# Altium PCB Isolated DCDC converter.PcbDoc
Units mm, origin at the board's own origin, x right, y up, seen from the top; angles counter-clockwise.
Board outline 55.88 x 25.4 mm, 2 copper layers (Top Layer, Bottom Layer), stack 1.575 mm thick; 26 components, 20 nets, 84 pads, 6 vias.
Unrouted connection lines stored in the file: 1.
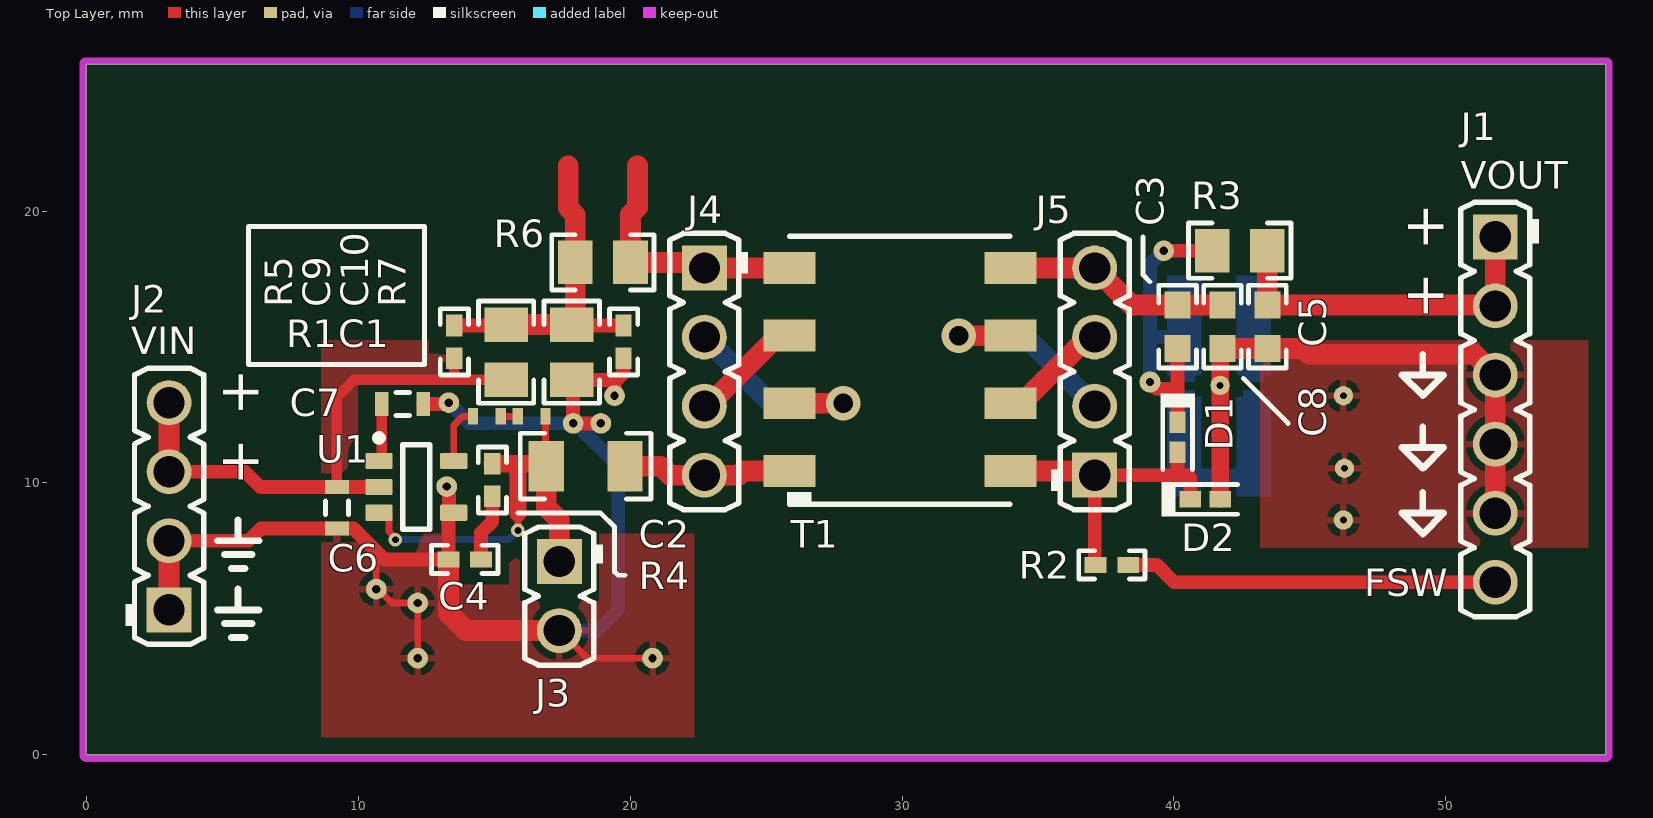
[diagram p0: Top Layer view]
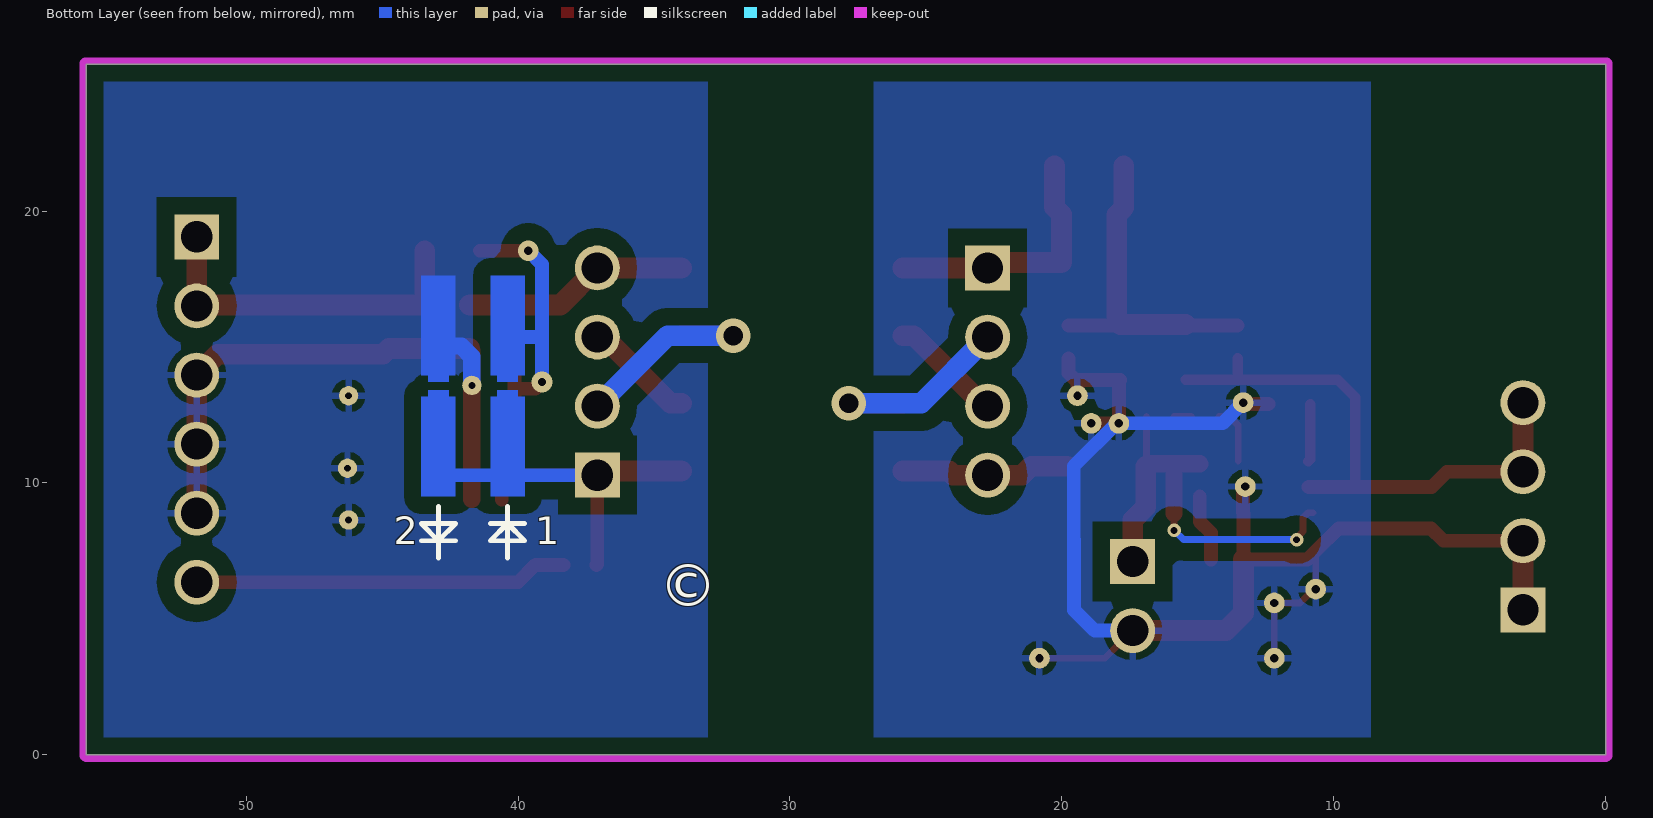
[diagram p1: Bottom Layer view, seen from below]

## Layer stack, top to bottom
Top Solder: solder mask 0.0102, Solder Resist, Dk 3.5
Top Layer: signal copper 0.0356
Dielectric1: core 1.5037, FR-4, Dk 4.8
Bottom Layer: signal copper 0.0356
Bottom Solder: solder mask 0.0102, Solder Resist, Dk 3.5

## Board outline
0,0 55.88,0 55.88,25.4 0,25.4

## Design rules (kind name [scope] priority, off if disabled: settings)
AcuteAngle [All] p1: minimum=4.50000000000000E+0001 checktracksonly=FALSE
AssemblyTestPointUsage [All] p1: valid=2
Clearance Clearance_Keepouts [((IsTrack Or IsArc) And Not InPoly) And IsFree and IsKeepOut vs ((IsTrack Or IsArc) And Not InPoly) And IsFree and IsKeepOut] p1: gap=0 ignorepadtopadclearanceinfootprint=FALSE
Clearance Clearance_BoardEdge_MountingHoles [OnCopper and InComponentClass('Mounting Holes') vs IsKeepOut] p2: gap=1.016 ignorepadtopadclearanceinfootprint=FALSE
Clearance Clearance_BoardEdge_Poly [OnCopper and InPoly vs IsKeepOut] p3: gap=0.635 ignorepadtopadclearanceinfootprint=FALSE
Clearance Clearance_BoardEdge [OnCopper and Not InComponentClass('Logo') and not InComponentClass('FiducialMark') and not InRegion(1000,500,4000,800) and Not IsKeepout vs IsKeepOut] p4: gap=1.905 ignorepadtopadclearanceinfootprint=FALSE
Clearance Clearance_Poly [InPolygon] p5: gap=0.635 ignorepadtopadclearanceinfootprint=FALSE
Clearance [All] p6: gap=0.2 ignorepadtopadclearanceinfootprint=FALSE
ComponentClearance ComponentClearance_MountingHoles_FiducialMarks [InComponentClass('Mounting Holes') vs InComponentClass('FiducialMark')] p1: gap=1.27 collisioncheckmode=3 verticalgap=0.254 showdistances=FALSE
ComponentClearance ComponentClearance_Shunt [InComponentClass('Header') vs InComponentClass('Shunt')] p2: gap=0 collisioncheckmode=3 verticalgap=0 showdistances=FALSE
ComponentClearance ComponentClearance_Logo [InComponentClass('Logo')] p3: gap=1.27 collisioncheckmode=3 verticalgap=0.254 showdistances=FALSE
ComponentClearance ComponentClearance_ScrewToNut [(HasFootprint('NY PMS 440 0025 PH')) vs (HasFootprint('Keystone_1902C'))] p4: gap=0.127 collisioncheckmode=3 verticalgap=0.254 showdistances=FALSE
ComponentClearance ComponentClearance_MountingHoles [InComponentClass('Mounting Holes')] p5: gap=6.35 collisioncheckmode=3 verticalgap=2540 showdistances=FALSE
ComponentClearance ComponentClearance_SmallPassives [HasFootprint('0201*') or HasFootprint('0402*') or HasFootprint('0508') or HasFootprint('0603*') or HasFootprint('0612') or HasFootprint('0805*') or HasFootprint('0815*') or HasFootprint('0830*') or HasFootprint('1206*') or HasFootprint('1210*') or HasFootprint('1808*') or HasFootprint('1812*') or HasFootprint('1825*') or HasFootprint('2010*') or HasFootprint('2220*') or HasFootprint('2225*') or HasFootprint('2512*') or HasFootprint('2728*') or HasFootprint('3518*') vs HasFootprint('0201*') or HasFootprint('0402*') or HasFootprint('0508') or HasFootprint('0603*') or HasFootprint('0612') or HasFootprint('0805*') or HasFootprint('0815*') or HasFootprint('0830*') or HasFootprint('1206*') or HasFootprint('1210*') or HasFootprint('1808*') or HasFootprint('1812*') or HasFootprint('1825*') or HasFootprint('2010*') or HasFootprint('2220*') or HasFootprint('2225*') or HasFootprint('2512*') or HasFootprint('2728*') or HasFootprint('3518*')] p6: gap=0.508 collisioncheckmode=3 verticalgap=0.254 showdistances=FALSE
ComponentClearance ComponentClearance_THtoSMT [IsThruComponent vs IsSMTComponent] p7: gap=1.27 collisioncheckmode=3 verticalgap=0.762 showdistances=FALSE
ComponentClearance ComponentClearance_THtoTH [IsThruComponent vs IsThruComponent] p8: gap=1.27 collisioncheckmode=3 verticalgap=0.762 showdistances=FALSE
ComponentClearance [All] p9: gap=1.016 collisioncheckmode=3 verticalgap=0.254 showdistances=FALSE
DiffPairsRouting [All] p1: maxlimit=2.54 minlimit=0.254 mostfreqgap=0.254 toplayer_minwidth=0.381 toplayer_maxwidth=0.381 toplayer_prefwidth=0.381 bottomlayer_minwidth=0.381 bottomlayer_maxwidth=0.381 bottomlayer_prefwidth=0.381 maxuncoupledlength=25.4
FabricationTestPointUsage TestPointUsage [All] p1: valid=2 allowmultiple=FALSE
FabricationTestpoint Testpoint [All] p1: side=3 testpointundercomponent=TRUE minsize=1.016 maxsize=2.54 preferedsize=1.524 minholesize=0 maxholesize=1.016 preferedholesize=0.813 testpointgrid=0.025 allowsidetop=TRUE allowsidebottom=TRUE usegrid=TRUE gridtolerance=0
FanoutControl Fanout_LCC [IsLCC] p1: bgadir=Out bgaviamode=Centered fanoutstyle=Auto fanoutdirection=Alternating viagrid=0.025 // Fanout_LCC (Default Rule)
FanoutControl Fanout_BGA [IsBGA] p2: bgadir=Out bgaviamode=Centered fanoutstyle=Auto fanoutdirection=Alternating viagrid=0.025 // Fanout_BGA (Default Rule)
FanoutControl Fanout_Default [All] p4: bgadir=Out bgaviamode=Centered fanoutstyle=Auto fanoutdirection=Alternating viagrid=0.025 // Fanout_Default (Default Rule)
FanoutControl Fanout_Small [(CompPinCount < 5)] p5: bgadir=Out bgaviamode=Centered fanoutstyle=Auto fanoutdirection=OutThenIn viagrid=0.025 // Fanout_Small (Default Rule)
HoleSize [All] p1: absolutevalues=TRUE maxlimit=6.375 minlimit=0.203 maxpercent=80.000 minpercent=20.000
MinimumAnnularRing MinimumAnnularRing_ThermalPadVias [IsVia and InAnyComponent] p1: minimumring=0.15
MinimumAnnularRing [All] p2: minimumring=0.229
MinimumSolderMaskSliver MinimumSolderMaskSliver_Logo [InComponentClass('Logo') vs InComponentClass('Logo')] p1: minsoldermaskwidth=0.018
MinimumSolderMaskSliver [All] p2: minsoldermaskwidth=0.1
PlaneConnect [All] p1: planeconnectstyle=Relief reliefexpansion=0.254 reliefentries=4 reliefconductorwidth=0.254 reliefairgap=0.254
PolygonConnect [All] p1: connectstyle=Relief reliefconductorwidth=0.254 reliefentries=4 polygonreliefangle="90 Angle" airgapwidth=0.254
RoutingVias ThermalPadVias [IsVia and InAnyComponent] p1: holewidth=0.2 width=0.5 viastyle="Through Hole" minholewidth=0.2 minwidth=0.5 maxholewidth=0.33 maxwidth=0.6
RoutingVias [All] p2: holewidth=0.406 width=0.864 viastyle="Through Hole" minholewidth=0.2 minwidth=0.66 maxholewidth=1.016 maxwidth=1.651
SilkToBoardRegionClearance [Not ((IsComment or IsDesignator) And (Hide <> 'False')) and not InRegion(1000,500,4000,800)] p1:
SilkToSilkClearance SilkToSilkClearance_Pb-FreeLogo [(HasFootprint('Pb-Free_Overlay_Medium') OR HasFootprint('Pb-Free_Overlay_Small')) vs (HasFootprint('Pb-Free_Overlay_Medium') OR HasFootprint('Pb-Free_Overlay_Small'))] p1: silktosilkclearance=0
SilkToSilkClearance [All] p2: silktosilkclearance=0.127
SilkToSolderMaskClearance "Silk to Solder Mask Opening" [All] p1: minsilkscreentomaskgap=0.025 clearancetoexposedcopper=FALSE
SolderMaskExpansion [All] p1: expansion=0.05 istentingtop=FALSE
SupplyNets "Schematic Supply Nets_1" [InNet('GND')] p1: voltage=0.000
SupplyNets "Schematic Supply Nets" [InNet('isoGND')] p2: voltage=0.000
Width [All] p1: maxlimit=2.54 minlimit=0.152 preferedwidth=0.254 checkconnectedcopper=TRUE
15 further rules are at their usual default settings.

## Classes and differential pairs
component class Header: J1 J2 J3 J4 J5

## Components (designator, comment, footprint, x,y, rotation, side; value= is the part's Value field where it differs from the comment)
C1 "CAP, CERM, 1uF, 10V, +/-10%, X5R, 0402" 0402S 16.383,12.446 r0 top locked value=1uF
C2 "CAP, CERM, 22uF, 10V, +/-10%, X5R, 1206" 1206 18.365,10.617 r180 top locked value=22uF
C3 "CGB3B1X5R1A475K055AC" 0603 40.132,15.748 r90 top locked value=4.7uF
C4 "GRM155R71H561KA01D" 0402 13.92,7.188 r180 top locked value=560pF
C5 "C1608X5R1E685K080AC" 0603 43.434,15.748 r270 top locked value=6.8uF
C6 "C0603C475K8PACTU" 0603S 9.221,9.093 r270 top locked value=4.7uF
C7 "GRM188R71A105KA61D" 0603S 11.634,12.903 r0 top locked value=1uF
C8 "CGB3B1X5R1A475K055AC" 0603 41.783,15.748 r270 top locked value=4.7uF
C9 "CAP, CERM, 10uF, 10V, +/-10%, X7R, 0805" 0805_HV 15.444,14.808 r90 top locked value=10uF
C10 "CAP, CERM, 10uF, 10V, +/-10%, X7R, 0805" 0805_HV 17.857,14.808 r270 top locked value=10uF
D1 "RB520S30,115" SOD-523 40.132,11.684 r270 top locked value=30V
D2 "RB520S30,115" SOD-523 41.148,9.398 r0 top locked value=30V
J1 "61300611121" WURTH_61300611121 51.816,12.7 r270 top locked
J2 "61300411121" WURTH_61300411121 3.048,9.144 r90 top locked
J3 "61300211121" WURTH_61300211121 17.399,5.842 r270 top locked
J4 "61300211121" WURTH_61300411121 22.733,14.097 r270 top locked
J5 "61300411121" WURTH_61300411121 37.084,14.097 r90 top locked
R1 "RES, 1.00k ohm, 1%, 0.063W, 0402" 0402S 14.732,12.446 r0 top locked value=1.00k
R2 "CRCW040210K0FKED" 0402 37.719,6.985 r0 top locked value=10.0k
R3 "CRCW08050000Z0EAHP" 0805_HV 42.418,18.542 r0 top locked value=0
R4 "RES, 10.0 ohm, 1%, 0.063W, 0402" 0402 14.936,10.109 r90 top locked value=10.0
R5 "RES, 499k ohm, 1%, 0.063W, 0402" 0402 13.539,15.189 r270 top locked value=499k
R6 "CRCW08050000Z0EAHP" 0805_HV 19,18.11 r180 top locked value=0
R7 "RES, 499k ohm, 1%, 0.063W, 0402" 0402 19.762,15.189 r90 top locked value=499k
T1 "750314839" Wurth_750314445 29.922,14.173 r90 top locked value=3mH
U1 "TPS60401QDBVRQ1" DBV0005A_N 12.142,9.855 r0 top locked

## Footprints (in the part's own frame and the unit in brackets; to place one, negate y for a bottom-side part, rotate by r counter-clockwise, add the part's x,y. Pads: shape width x height; smd on the part's side, far side on the other; paste and mask are expansions set on the pad)
0402 [mm] "0402 from SM-752 data"
  rect 0.8x0.6 smd: 1(-0.6,0) 2(0.6,0)
  silkscreen extent -1.22,-0.52 1.22,0.52, body extent -0.55,-0.3 0.55,0.3, height 0.6
0402S [mil] "Based on C0402S footprint from PADS legacy"
  rect 15x24 smd: 1(-20,0) 2(20,0)
  body extent -22,-12 22,12, height 24
0603 [mm] "0603 from SM-752 data"
  rect 1x0.95 smd: 1(-0.8,0) 2(0.8,0)
  silkscreen extent -1.52,-0.69 1.52,0.69, body extent -0.87,-0.47 0.87,0.47, height 0.85
0603S [mil]
  rect 20x35 smd: 1(-30,0) 2(30,0)
  silkscreen extent -10,-17 10,17, body extent -34,-19 34,19, height 33
0805_HV [mil] "0805 with 30mil clearance between pads"
  rect 50x63 smd: 1(-40,0) 2(40,0)
  silkscreen extent -74,-40 74,40, body extent -43,-29 43,29, height 43
1206 [mm] "1206 from SM-752 data"
  rect 1.3x1.85 smd: 1(-1.45,0) 2(1.45,0)
  silkscreen extent -2.4,-1.21 2.4,1.21, body extent -1.7,-0.9 1.7,0.9, height 1.35
DBV0005A_N [mm] "SOT23, 5-Leads, Body 3.05x1.75mm, Pitch 0.95mm, IPC Medium Density"
  rrect17% 1x0.6 smd: 1(-1.375,0.95) 2(-1.375,0) 3(-1.375,-0.95) 4(1.375,-0.95) 5(1.375,0.95)
  silkscreen extent -1.5,-1.55 0.5,1.92, body extent -1.42,-1.46 1.42,1.46, height 1.08
SOD-523 [mm] "NXP Semiconductor recommended land pattern, nominal STEP model"
  rect 0.8x0.6 smd paste-0.05: 1(-0.55,0) 2(0.55,0)
  silkscreen extent -1.6,-0.64 1.2,0.63, body extent -0.8,-0.4 0.8,0.4, height 0.72
Wurth_750314445 [mm] "WURTH"
  rect 1.17x1.91 smd: 1(-3.735,4.065) 2(-1.245,4.065) 3(1.245,4.065) 4(3.735,4.065) 5(3.735,-4.065) 6(1.245,-4.065) 7(-1.245,-4.065) 8(-3.735,-4.065)
  silkscreen extent -5,-4.05 4.9,4.15, body extent -4.92,-4.58 4.9,4.58, height 10.1
WURTH_61300211121 [mm] "Header, 2.54mm, 2x1, TH"
  rect 1.65x1.65 hole 1.15: 1(-1.27,0)
  round 1.65 hole 1.15: 2(1.27,0)
  silkscreen extent -2.54,-1.27 2.54,1.6, body extent -2.54,-1.27 2.54,1.27, height 8.54
WURTH_61300411121 [mm] "Header, 2.54mm, 4x1, TH"
  rect 1.65x1.65 hole 1.15: 1(-3.81,0)
  round 1.65 hole 1.15: 2(-1.27,0) 3(1.27,0) 4(3.81,0)
  silkscreen extent -5.08,-1.27 5.08,1.6, body extent -5.08,-1.27 5.08,1.27, height 8.54
WURTH_61300611121 [mm] "Header, 2.54mm, 6x1, TH"
  rect 1.65x1.65 hole 1.15: 1(-6.35,0)
  round 1.65 hole 1.15: 2(-3.81,0) 3(-1.27,0) 4(1.27,0) 5(3.81,0) 6(6.35,0)
  silkscreen extent -7.62,-1.27 7.62,1.6, body extent -7.62,-1.27 7.62,1.27, height 8.54

## Part data
C1: library part GRM155R61A105KE15D, Cap_Case=0402, Manufacturer=MuRata, Supplier Part Number 1=490-3890-1-ND, TempCo=X5R, Tolerance_%=10, Value1=Unknown, Value2=10V, ValueDisplayed=1µF, Cap_F=0.000001, ComponentLink1Description="Datasheet link", ComponentLink1URL=http://search.murata.co.jp/Ceramy/PnsearchViewAction.do?HnOFG=ON&HnNFG=ON&SEL_CNT=50&sLang=en&sKey=GRM155R61A105KE15D&x=9&y=9&search=startwith, CompType=Capacitor, LatestRevisionDate=2014-05-23, MountType=SMT, PackageReference=0402, PartNumber=GRM155R61A105KE15D, Polarized=N, Published=2008-06-19, Publisher="Texas Instruments", RoHS=Y, Supplier 1=Digi-Key, Supplier 2=Mouser, Supplier 3=Farnell, Supplier Part Number 2=81-GRM155R61A105KE15, Supplier Part Number 3=1735523, SymbolVersion=2008-07-09, TaMax_C=85, TaMin_C=-55, Technology=Ceramic, U/M=EA, VDC_V=10
C2: library part GRM31CR61A226KE19L, Cap_Case=1206, Manufacturer=MuRata, Supplier Part Number 1=GRM31CR61A226KE19L-ND, TempCo=X5R, Tolerance_%=10, Value1=Unknown, Value2=10V, ValueDisplayed=22µF, Cap_F=0.000022, ComponentLink1Description="Datasheet link", ComponentLink1URL=http://search.murata.co.jp/Ceramy/PnsearchViewAction.do?HnOFG=ON&HnNFG=ON&SEL_CNT=50&sLang=en&sKey=GRM31CR61A226KE19L&x=9&y=9&search=startwith, CompType=Capacitor, LatestRevisionDate=2014-05-23, MountType=SMT, PackageReference=1206, PartNumber=GRM31CR61A226KE19L, Polarized=N, Published=2008-06-19, Publisher="Texas Instruments", RoHS=Y, Supplier 1=Digi-Key, Supplier 2=Mouser, Supplier 3=Farnell, Supplier Part Number 2=81-GRM31CR61A226KE9L, Supplier Part Number 3=1907515, SymbolVersion=2008-07-09, TaMax_C=85, TaMin_C=-55, Technology=Ceramic, U/M=EA, VDC_V=10
C3 C8: "CAP, CERM, 4.7 µF, 10 V, +/- 10%, X5R, 0603", Cap_Case=0603, Manufacturer=TDK, Supplier Part Number 1=445-7482-1-ND, TempCo=X5R, Tolerance_%=10, Value1=Unknown, Value2=10V, ValueDisplayed=4.7µF, Cap_F=0.0000047, ComponentLink1Description="Datasheet link", ComponentLink1URL=http://www.tdk.com/pdf/mlcc_product_guide_A12.pdf, CompType=Capacitor, LatestRevisionDate=2014-11-05, MountType=SMT, PackageReference=0603, PartNumber=CGB3B1X5R1A475K055AC, Polarized=N, Published=2008-06-19, Publisher="Texas Instruments", RoHS=Y, Supplier 1=Digi-Key, SymbolVersion=2008-07-09, TaMax_C=85, TaMin_C=-55, Technology=Ceramic, U/M=EA, VDC_V=10
C4: "CAP, CERM, 560pF, 50V, +/-10%, X7R, 0402", Cap_Case=0402, Manufacturer=MuRata, Supplier Part Number 1=490-1301-1-ND, TempCo=X7R, Tolerance_%=10, Value1=Unknown, Value2=50V, ValueDisplayed=560pF, Cap_F=0.00000000056, ComponentLink1Description="Datasheet link", ComponentLink1URL=http://search.murata.co.jp/Ceramy/PnsearchViewAction.do?HnOFG=ON&HnNFG=ON&SEL_CNT=50&sLang=en&sKey=GRM155R71H561KA01D&x=9&y=9&search=startwith, CompType=Capacitor, LatestRevisionDate=2014-05-23, MountType=SMT, PackageReference=0402, PartNumber=GRM155R71H561KA01D, Polarized=N, Published=2008-06-19, Publisher="Texas Instruments", RoHS=Y, Supplier 1=Digi-Key, Supplier 2=Mouser, Supplier Part Number 2=81-GRM155R71H561KA01, SymbolVersion=2008-07-09, TaMax_C=125, TaMin_C=-55, Technology=Ceramic, U/M=EA, VDC_V=50
C5: "CAP, CERM, 6.8 µF, 25 V, +/- 10%, X5R, 0603", Cap_Case=0603, Manufacturer=TDK, Supplier Part Number 1=445-14145-6-ND, TempCo=X5R, Tolerance_%=10, Value1=Unknown, Value2=25V, ValueDisplayed=6.8µF, Cap_F=0.0000068, ComponentLink1Description="Datasheet link", ComponentLink1URL=http://product.tdk.com/capacitor/mlcc/en/documents/mlcc_commercial_general_en.pdf, CompType=Capacitor, LatestRevisionDate=2014-11-05, MountType=SMT, PackageReference=0603, PartNumber=C1608X5R1E685K080AC, Polarized=N, Published=2008-06-19, Publisher="Texas Instruments", RoHS=Y, Supplier 1=Digi-Key, SymbolVersion=2008-07-09, TaMax_C=85, TaMin_C=-55, Technology=Ceramic, U/M=EA, VDC_V=25
C6: "CAP, CERM, 4.7uF, 10V, +/-10%, X5R, 0603", Cap_Case=0603, Manufacturer=Kemet, Supplier Part Number 1=399-5503-1-ND, TempCo=X5R, Tolerance_%=10, Value1="0.006 ohm", Value2=10V, ValueDisplayed=4.7µF, Cap_F=0.0000047, ComponentLink1Description="Datasheet link", ComponentLink1URL=http://www.kemet.com/kemet/web/homepage/kechome.nsf/vapubfiles/F3102_Y5V.pdf/$file/F3102_Y5V.pdf, CompType=Capacitor, ESR_ohm=0.006, IRMS_A=7.24, LatestRevisionDate=2014-05-23, MountType=SMT, PackageReference=0603, PartNumber=C0603C475K8PACTU, Polarized=N, Published=2008-06-19, Publisher="Texas Instruments", RoHS=Y, Supplier 1=Digi-Key, Supplier 2=Mouser, Supplier 3=Farnell, Supplier Part Number 2=80-C0603C475K8P, Supplier Part Number 3=1572625, SymbolVersion=2008-07-09, TaMax_C=85, TaMin_C=-55, Technology=Ceramic, U/M=EA, VDC_V=10
C7: "CAP, CERM, 1uF, 10V, +/-10%, X7R, 0603", Cap_Case=0603, Manufacturer=MuRata, Supplier Part Number 1=490-3899-1-ND, TempCo=X7R, Tolerance_%=10, Value1="0.011 ohm", Value2=10V, ValueDisplayed=1µF, Cap_F=0.000001, ComponentLink1Description="Datasheet link", ComponentLink1URL=http://search.murata.co.jp/Ceramy/PnsearchViewAction.do?HnOFG=ON&HnNFG=ON&SEL_CNT=50&sLang=en&sKey=GRM188R71A105KA61D&x=9&y=9&search=startwith, CompType=Capacitor, ESR_ohm=0.011, LatestRevisionDate=2014-06-11, MountType=SMT, PackageReference=0603, PartNumber=GRM188R71A105KA61D, Polarized=N, Published=2008-06-19, Publisher="Texas Instruments", RoHS=Y, Supplier 1=Digi-Key, Supplier 2=Mouser, Supplier 3=Farnell, Supplier Part Number 2=81-GRM188R71A105KA1D, Supplier Part Number 3=1845766, SymbolVersion=2008-07-09, TaMax_C=125, TaMin_C=-55, Technology=Ceramic, U/M=EA, VDC_V=10
C9 C10: library part GRM21BR71A106KE51L, Cap_Case=0805, Manufacturer=MuRata, Supplier Part Number 1=490-3905-1-ND, TempCo=X7R, Tolerance_%=10, Value1="0.003 ohm", Value2=10V, ValueDisplayed=10µF, Cap_F=0.00001, ComponentLink1Description="Datasheet link", ComponentLink1URL=http://search.murata.co.jp/Ceramy/PnsearchViewAction.do?HnOFG=ON&HnNFG=ON&SEL_CNT=50&sLang=en&sKey=GRM21BR71A106KE51L&x=9&y=9&search=startwith, CompType=Capacitor, ESR_ohm=0.003, LatestRevisionDate=2014-05-23, MountType=SMT, PackageReference=0805, PartNumber=GRM21BR71A106KE51L, Polarized=N, Published=2008-06-19, Publisher="Texas Instruments", RoHS=Y, Supplier 1=Digi-Key, Supplier 2=Mouser, Supplier 3=Farnell, Supplier Part Number 2=81-GRM21BR71A106KE51, Supplier Part Number 3=1828828, SymbolVersion=2008-07-09, TaMax_C=125, TaMin_C=-55, Technology=Ceramic, U/M=EA, VDC_V=10
D1 D2: "Diode, Schottky, 30 V, 0.2 A, SOD-523", Manufacturer="NXP Semiconductor", Supplier Part Number 1=568-8470-1-ND, Value1=0.2A, Value2=0.6V, ComponentLink1Description="Datasheet link", ComponentLink1URL=http://www.nxp.com/documents/data_sheet/RB520S30.pdf, CompType=Diode, Io_A=0.2, LatestRevisionDate=2014-11-05, MountType=SMT, PackageReference=SOD-523, PartNumber=RB520S30,115, Published=2008-06-26, Publisher="Texas Instruments", RoHS=Y, Supplier 1=Digi-Key, Supplier 2=Mouser, Supplier Part Number 2=771-RB520S30115, SymbolVersion=2008-12-08, TJmax_C=150, Type=Schottky, U/M=EA, Vf_V=0.6, Vr_V=30
J1: "Header, 2.54 mm, 6x1, Gold, TH", Manufacturer="Wurth Elektronik eiSos", Supplier Part Number 1=732-5319-ND, ClassName=Header, ComponentLink1Description="Datasheet Link", ComponentLink1URL=http://katalog.we-online.de/em/datasheet/6130xx11121.pdf, CompType=Header, LatestRevisionDate=2014-11-10, MountType=TH, PackageReference="Header, 2.54mm, 6x1, TH", PartNumber=61300611121, Publisher="Texas Instruments", RoHS=Y, Supplier 1=Digi-Key, Supplier 2=Mouser, Supplier 3=Farnell, Supplier Part Number 2=710-61300611121, Supplier Part Number 3=2356158, SymbolCreator=a0412235, SymbolVersion=2013-08-30, U/M=EA
J2 J5: "Header, 2.54 mm, 4x1, Gold, TH", Manufacturer="Wurth Elektronik eiSos", Supplier Part Number 1=732-5317-ND, ClassName=Header, ComponentLink1Description="Datasheet Link", ComponentLink1URL=http://katalog.we-online.de/em/datasheet/6130xx11121.pdf, CompType=Header, LatestRevisionDate=2014-11-05, MountType=TH, PackageReference="Header, 2.54mm, 4x1, TH", PartNumber=61300411121, Publisher="Texas Instruments", RoHS=Y, Supplier 1=Digi-Key, SymbolCreator=a0412235, SymbolVersion=2013-08-30, U/M=EA
J3 J4: "Header, 2.54 mm, 2x1, Gold, TH", Manufacturer="Wurth Elektronik eiSos", Supplier Part Number 1=732-5315-ND, ClassName=Header, ComponentLink1Description="Datasheet Link", ComponentLink1URL=http://katalog.we-online.de/em/datasheet/6130xx11121.pdf, CompType=Header, MountType=TH, PackageReference="Header, 2.54mm, 2x1, TH", PartNumber=61300211121, Publisher="Texas Instruments", RoHS=Y, Supplier 1=Digi-Key, Supplier 2=Mouser, Supplier 3=Farnell, Supplier Part Number 2=710-61300211121, Supplier Part Number 3=2356153, SymbolCreator=a0412235, SymbolVersion=2013-10-31, U/M=EA
  J3: LatestRevisionDate=2014-11-10
  J4: LatestRevisionDate=2014-11-05
R1: library part CRCW04021K00FKED, Manufacturer=Vishay-Dale, Power_W=0.063, Supplier Part Number 1=541-1.00KLCT-ND, TempCo="100 ppm/C", Tolerance_%=1, Value1=1%, Value2=0.063W, Value_Code=1k00, ComponentLink1Description="Datasheet link", ComponentLink1URL=http://www.vishay.com/docs/20035/dcrcwe3.pdf, CompType=Resistor, EIA_Code=E96, LatestRevisionDate=2013-11-01, MountType=SMT, PackageReference=0402, PartNumber=CRCW04021K00FKED, Published=2008-06-26, Publisher="Texas Instruments", Res_ohm=1000, RoHS=Y, Supplier 1=Digi-Key, Supplier 2=Mouser, Supplier 3=Farnell, Supplier Part Number 2=71-CRCW0402-1.0K-E3, Supplier Part Number 3=1469662, SymbolVersion=2009-05-29, Technology="Thick Film", U/M=EA, VDC_V=50
R2: "RES, 10.0 k, 1%, 0.063 W, 0402", Manufacturer=Vishay-Dale, Power_W=0.063, Supplier Part Number 1=541-10.0KLCT-ND, TempCo="100 ppm/C", Tolerance_%=1, Value1=1%, Value2=0.063W, Value_Code=10k0, ValueDisplayed=10.0k, ComponentLink1Description="Datasheet link", ComponentLink1URL=http://www.vishay.com/docs/20035/dcrcwe3.pdf, CompType=Resistor, EIA_Code=E96, LatestRevisionDate=2014-10-30, MountType=SMT, PackageReference=0402, PartNumber=CRCW040210K0FKED, Published=2008-06-26, Publisher="Texas Instruments", Res_ohm=10000, RoHS=Y, Supplier 1=Digi-Key, Supplier 2=Mouser, Supplier 3=Farnell, Supplier Part Number 2=71-CRCW0402-10K-E3, Supplier Part Number 3=1469669, SymbolVersion=2009-05-29, Technology="Thick Film", U/M=EA, VDC_V=50
R3 R6: "RES, 0, 5%, 0.333 W, 0805", Manufacturer=Vishay-Dale, Power_W=0.333, Supplier Part Number 1=541-0.0TBCT-ND, TempCo="200 ppm/C", Tolerance_%=5, Value1=5%, Value2=0.333W, Value_Code=0000, ValueDisplayed=0, ComponentLink1Description="Datasheet link", ComponentLink1URL=http://www.vishay.com/docs/20043/crcwhpe3.pdf, CompType=Resistor, EIA_Code=E24, LatestRevisionDate=2014-11-05, MountType=SMT, PackageReference=0805, PartNumber=CRCW08050000Z0EAHP, Published=2008-06-26, Publisher="Texas Instruments", Res_ohm=0, RoHS=Y, Supplier 1=Digi-Key, Supplier 2=Mouser, Supplier 3=Farnell, Supplier Part Number 2=71-CRCW08050000Z0EAH, Supplier Part Number 3=1798268, SymbolVersion=2009-05-29, Technology="Thick Film", U/M=EA
R4: library part CRCW040210R0FKED, Manufacturer=Vishay-Dale, Power_W=0.063, Supplier Part Number 1=541-10.0LCT-ND, TempCo="100 ppm/C", Tolerance_%=1, Value1=1%, Value2=0.063W, Value_Code=10R0, ComponentLink1Description="Datasheet link", ComponentLink1URL=http://www.vishay.com/docs/20035/dcrcwe3.pdf, CompType=Resistor, EIA_Code=E96, LatestRevisionDate=2013-11-01, MountType=SMT, PackageReference=0402, PartNumber=CRCW040210R0FKED, Published=2008-06-26, Publisher="Texas Instruments", Res_ohm=10, RoHS=Y, Supplier 1=Digi-Key, Supplier 2=Mouser, Supplier 3=Farnell, Supplier Part Number 2=71-CRCW0402-10-E3, Supplier Part Number 3=9238999, SymbolVersion=2009-05-29, Technology="Thick Film", U/M=EA, VDC_V=50
R5 R7: library part CRCW0402499KFKED, Manufacturer=Vishay-Dale, Power_W=0.063, Supplier Part Number 1=541-499KLCT-ND, TempCo="100 ppm/C", Tolerance_%=1, Value1=1%, Value2=0.063W, Value_Code=499k, ComponentLink1Description="Datasheet link", ComponentLink1URL=http://www.vishay.com/docs/20035/dcrcwe3.pdf, CompType=Resistor, EIA_Code=E96, LatestRevisionDate=2013-11-01, MountType=SMT, PackageReference=0402, PartNumber=CRCW0402499KFKED, Published=2008-06-26, Publisher="Texas Instruments", Res_ohm=499000, RoHS=Y, Supplier 1=Digi-Key, Supplier 2=Mouser, Supplier 3=Farnell, Supplier Part Number 2=71-CRCW0402-499K-E3, Supplier Part Number 3=1469723, SymbolVersion=2009-05-29, Technology="Thick Film", U/M=EA, VDC_V=50
T1: "Transformer, 3mH, SMT", Manufacturer="Wurth Elektronik eiSos", ComponentLink1Description="Datasheet Link", ComponentLink1URL="https://sps06.itg.ti.com/sites/KMS/crossdivteams/altium/docs/ComponentDatasheets/750314839pre (2).pdf", CompType=Transformer, DCR_Ohm=1.2, LatestRevisionDate=2014-05-27, MountType=SMT, PackageReference=9.78x10.54x9.14mm, PartNumber=750314839, Publisher="Texas Instruments", RoHS=Y, SymbolCreator=a0799628, SymbolVersion=2014-05-22, U/M=EA
U1: library part CMP-0391-00011-2, "-1.8 to -5.25 V, Inverting Charge Pump Regulator, 60 mA, 1.8 to 5.25 V Input, -40 to 125 degC, 5-pin SOT23 (DBV5), Green (RoHS & no Sb/Br)", Manufacturer="Texas Instruments", Switching Frequency(Max)(kHz)=30, Code_JEDEC=MO-178, ComponentLink1Description="Manufacturer URL", ComponentLink1URL=http://www.ti.com/, ComponentLink2Description=Datasheet, ComponentLink2URL=http://www.ti.com/general/docs/lit/getliterature.tsp?genericPartNumber=TPS60401-Q1&fileType=pdf, ComponentLink3Description="Package Specification", ComponentLink3URL=http://www.ti.com/litv/pdf/mpds018i, DatasheetVersion=SGLS246A, Eco-Plan="Green (RoHS & no Sb/Br)", Efficiency(Typ)(%)=>90, Iout(Max)(A)=0.06, Iq(Typ)(mA)=0.065, Mounting Technology="Surface Mount", PackageDescription="5-Pin Plastic Small Outline, Body 1.60 Ãƒâ€” 2.90 mm, Pitch 0.95 mm", PackageReference=DBV0005A, PackageVersion=4073253-4/K, PartNumber=TPS60401QDBVRQ1, Topology="Inverting Buck/Boost", Vin(Max)(V)=5.25, Vin(Min)(V)=1.8, Vout(Max)(V)=-5.25, Vout(Min)(V)=-1.8

## Free pads (board coordinates)
  round 0.762 hole 0.305: 0(10.668,6.096) 0(12.192,3.556) 0(12.192,5.588) 0(13.259,9.869) 0(13.335,12.954) 0(17.907,12.192) 0(18.923,12.192) 0(19.431,13.208) 0(20.828,3.556)
  round 0.711 hole 0.254: 0(41.698,13.589) 0(46.228,8.636) 0(46.228,13.208) 0(46.27,10.541)

## Via types
v1: diameter 0.5, hole 0.25, Top Layer to Bottom Layer, 2 vias
v2: diameter 1.27, hole 0.711, Top Layer to Bottom Layer, 2 vias
v3: diameter 0.762, hole 0.305, Top Layer to Bottom Layer, 2 vias

## Nets (pads, with @x,y where several pads share a name; then routed paths per layer and width w, separated by ;. In a path a pad name is that pad's centre, name@x,y a point inside that pad or via, vN(x,y) a via of type N, cw(c..) or ccw(c..) an arc to the next point about the centre after c; other vN are vias at no path point)
GND: C4.2 C6.2 C7.2 C10.2 J2.1 J2.2 J3.2 pad.0@10.668,6.096 pad.0@12.192,3.556 pad.0@12.192,5.588 pad.0@13.259,9.869 pad.0@13.335,12.954 pad.0@17.907,12.192 pad.0@18.923,12.192 pad.0@19.431,13.208 pad.0@20.828,3.556 R7.1 U1.4 | length 53.1
  Top Layer w0.254: 10.668,7.493 10.668,6.096 10.73,6.096 11.238,5.588 12.192,5.588 pad.0@12.192,3.556 ; J3.2 18.415,3.556 pad.0@20.828,3.556
  Top Layer w0.508: J2.2 5.969,7.874 6.426,8.331 C6.2 9.83,8.331 10.668,7.493 10.973,7.188 C4.2 U1.4@13.32,8.883 ; C7.2 pad.0@13.284,12.903 ; pad.0@13.259,9.869 13.342,9.786 U1.4@13.342,8.905 ; pad.0@18.923,12.192 17.907,12.192 17.907,13.742 C10.2 19.507,13.792 ; pad.0@19.431,13.208 19.431,13.716 19.507,13.792 ; R7.1 19.762,14.047 19.507,13.792
  Top Layer w0.762: J2.1 J2.2 ; C4.2 13.32,5.222 13.97,4.572 J3.2
  Bottom Layer w0.508: pad.0@13.335,12.954 14.095,12.194 17.907,12.192 17.989,12.192 19.564,10.617 19.558,5.334 18.796,4.572 J3.2
ISOGND: C5.2 C8.2 D2.2 J1.3 J1.4 J1.5 pad.0@41.698,13.589 pad.0@46.27,10.541 pad.0@46.228,8.636 pad.0@46.228,13.208 | length 23.6
  Top Layer w0.635: D2.2 41.698,13.589 41.698,14.863 C8.2
  Top Layer w0.762: C8.2 C5.2 44.742,14.948 44.958,14.732 51.054,14.732 J1.3 J1.4 J1.5
  Bottom Layer w0.635: pad.0@41.698,13.589 41.698,14.647 42.086,15.035 42.96,15.035
NetC1_1: C1.1 R1.2 | length 0.6
  Top Layer w0.254: R1.2 C1.1
NetC1_2: C1.2 C2.2 J3.1 R4.2 U1.3 | length 16.6
  Top Layer w0.254: U1.3 10.955,8.905 11.128,8.732 11.128,8.224 11.371,7.981 v1(11.371,7.915) ; v1(15.875,8.255) 15.875,9.521 15.879,9.525 ; C1.2 16.891,10.641 C2.2
  Top Layer w0.635: R4.2 15.879,10.709 ; 15.875,8.89 15.879,8.894 15.879,9.525 15.879,10.709 ; C2.2@16.891,10.641 16.823,10.709 15.879,10.709
  Top Layer w0.762: C2.2 16.915,9.12 17.399,8.636 J3.1
  Bottom Layer w0.254: v1(11.371,7.915) 15.535,7.915 v1(15.875,8.255)
NetC2_1: C2.1 T1.1 | length 6.2
  Top Layer w0.762: C2.1 21.133,10.617 21.463,10.287 22.733,10.287 24.003,10.287 24.154,10.438 T1.1
NetC3_1: C3.1 D1.1 R3.1 | length 11.8
  Top Layer w0.508: v3(39.116,13.716) 39.37,13.462 40.132,13.462 ; v3(39.624,18.542) R3.1 ; D1.1 40.132,13.462 ; C3.1 40.132,13.462
  Bottom Layer w0.508: v3(39.116,13.716) 39.116,15.367 ; v3(39.624,18.542) 39.116,18.034 39.116,15.367 ; 40.259,15.367 39.116,15.367
NetC3_2: C3.2 C8.1 J5.4 T1.5 | length 8.4
  Top Layer w0.762: T1.5 T1.5 J5.4 38.443,16.548 C3.2 C8.1
NetC4_1: C4.1 R4.1 | length 2.5
  Top Layer w0.508: C4.1 14.52,8.17 14.936,8.586 R4.1
NetC5_1: C5.1 J1.1 J1.2 R3.2 | length 12.9
  Top Layer w0.762: R3.2 C5.1 51.778,16.548 51.816,16.586 J1.1
NetC7_1: C7.1 U1.1 | length 2.1
  Top Layer w0.381: C7.1 10.872,10.875 U1.1@10.942,10.805
NetC9_2: C9.2 C10.1 J4.2 R5.1 R6.2 R7.2 | length 12.3
  Top Layer w0.508: R5.1 15.409,15.789 C9.2 ; C10.1 17.892,15.789 R7.2
  Top Layer w0.762: C9.2 C10.1 17.984,15.951 R6.2 17.984,19.862 17.73,20.116 17.73,21.666
NetD1_2: D1.2 D2.1 J5.1 R2.1 T1.8 | length 17.5
  Top Layer w0.508: R2.1 37.084,7.02 J5.1 40.132,10.287 ; D1.2 40.132,10.287 ; D2.1 40.598,10.202 40.513,10.287 40.132,10.287
  Top Layer w0.762: T1.8 36.933,10.438 J5.1
  Bottom Layer w0.508: J5.1 42.926,10.287
NetJ1_6: J1.6 R2.2 | length 13.8
  Top Layer w0.508: R2.2 39.37,6.985 40.005,6.35 J1.6
NetJ4_1: J4.1 R6.1 T1.4 | length 9.6
  Top Layer w0.762: 20.27,21.666 20.27,20.136 20.016,19.882 R6.1 22.53,18.11 J4.1 25.855,17.907 T1.4
NetJ5_2: J5.2 T1.6 | length 8.2
  Top Layer w0.508: J5.2@37.288,12.903 J5.2@37.288,13.157
  Top Layer w0.762: v2(32.08,15.418) T1.6
  Bottom Layer w0.762: v2(32.08,15.418) 34.493,15.418 J5.2
NetJ5_3: J5.3 T1.7 | length 4.1
  Top Layer w0.762: T1.7 34.395,12.928 36.834,15.367 J5.3
NetJ?_2: T1.2
NetJ?_3: T1.3 | length 12.3
  Top Layer w0.762: 22.733,12.827 22.86,12.827 25.451,15.418 T1.3 ; 25.857,12.928 v2(27.839,12.928)
  Bottom Layer w0.762: 22.733,15.367 25.172,12.928 v2(27.839,12.928)
NetR1_1: R1.1 U1.5 | length 2.2
  Top Layer w0.254: U1.5 13.517,11.756 13.517,12.12 13.843,12.446 R1.1
VIN: C6.1 C9.1 J2.3 J2.4 R5.2 U1.2 | length 21.3
  Top Layer w0.381: C6.1 9.221,13.158 9.855,13.792 13.462,13.792 ; R5.2 13.539,13.869 13.462,13.792 ; C9.1 13.462,13.792
  Top Layer w0.508: J2.3 5.842,10.414 6.401,9.855 C6.1 U1.2@10.942,9.855
  Top Layer w0.762: J2.3 J2.4
pads on no net: J4.3 J4.4

## Polygon pours and split planes (outlines as drawn)
VIN on Top Layer "Top Layer-No Net 1" (solid, remove dead copper, pour order 8): 8.636,10.16 8.636,15.24 13.716,15.24 13.716,10.16
GND on Top Layer "Top Layer-No Net" (solid, remove dead copper, pour order 6): 8.636,8.128 8.636,0 22.352,0 22.352,8.128
ISOGND on Top Layer "Top Layer-No Net 2" (solid, remove dead copper, pour order 12): 43.18,14.224 43.18,7.62 55.88,7.62 55.88,15.24 43.18,15.24
GND on Bottom Layer "Bottom Layer-No Net 1" (solid, remove dead copper, pour order 10): 8.636,0 8.636,25.4 26.924,25.4 26.924,0
ISOGND on Bottom Layer "Bottom Layer-No Net" (solid, remove dead copper, pour order 2): 55.88,25.4 33.02,25.4 33.02,0 55.88,0

## Keep-outs
Keep-Out Layer:
  lines w0.254: -0.127,0 ccw(c0,0) 0,-0.127 ; -0.127,0 ccw(c0,0) 0,-0.127 ; -0.127,0 -0.127,25.4 ; -0.127,25.4 cw(c0,25.4) 0,25.527 ; -0.127,25.4 cw(c0,25.4) 0,25.527 ; 0,-0.127 55.88,-0.127 ; 0,25.527 55.88,25.527 ; 55.88,-0.127 ccw(c55.88,0) 56.007,0 ; 55.88,-0.127 ccw(c55.88,0) 56.007,0 ; 55.88,25.527 cw(c55.88,25.4) 56.007,25.4 ; 55.88,25.527 cw(c55.88,25.4) 56.007,25.4 ; 56.007,0 56.007,25.4
  text ".Layer_Name" at 92.075,10.16 h1.52

## Other copper
Top Layer:
  text ".Layer_Name" at 66.04,21.59 h1.52
Bottom Layer:
  rectangle net NetC3_1: 40.005,13.716 40.767,13.945
  rectangle net NetD1_2: 40.005,13.183 40.767,13.411
  rectangle net NetD1_2: 42.545,13.183 43.307,13.411
  rectangle net NetD1_2: 42.291,9.5 43.561,13.183
  rectangle net ISOGND: 42.545,13.716 43.307,13.945
  rectangle net ISOGND: 42.291,13.945 43.561,17.628
  rectangle net NetC3_1: 39.751,13.945 41.021,17.628
  rectangle net NetD1_2: 39.751,9.5 41.021,13.183
  text ".Layer_Name" at 88.265,21.59 h1.52

## Silkscreen, mask and mechanical layers (free items; w line width, h text height)
Top Overlay:
  lines w0.178: 15.875,8.89 18.923,8.89 19.431,8.382 19.431,6.731 19.558,6.604 19.812,6.604 ; 38.862,19.05 38.862,17.653 39.116,17.399 ; 42.545,13.843 44.196,12.192 ; 5.969,14.351 5.969,19.431 12.446,19.431 12.446,14.351 5.969,14.351
  lines w0.254: 4.826,5.334 6.35,5.334 ; 4.826,7.874 6.35,7.874 ; 5.08,4.826 6.096,4.826 ; 5.08,7.366 6.096,7.366 ; 5.334,4.318 5.842,4.318 ; 5.334,6.858 5.842,6.858 ; 5.588,5.334 5.588,6.096 ; 5.588,7.874 5.588,8.636 ; 49.149,8.89 49.149,9.652 ; 49.149,11.303 49.149,12.065 ; 49.149,13.97 49.149,14.732 ; 48.387,8.89 49.911,8.89 49.149,8.128 48.387,8.89 ; 48.387,11.303 49.149,10.541 49.911,11.303 48.387,11.303 ; 48.387,13.97 49.911,13.97 49.149,13.208 48.387,13.97
  text "VOUT" at 50.546,20.828 h1.02
  text "+" at 49.911,18.542 h1.52 r90
  text "+" at 49.911,16.002 h1.52 r90
  text ".Layer_Name" at 66.04,15.875 h1.52
  text "VIN" at 1.651,14.732 h1.02
  text "+" at 6.35,12.446 h1.52 r90
  text "+" at 6.35,9.906 h1.52 r90
  text "FSW" at 46.99,5.842 h1.02
Bottom Overlay:
  lines w0.178: 39.751,8.509 41.021,8.509 ; 40.386,7.239 40.386,9.144 ; 42.291,7.874 43.561,7.874 ; 42.926,7.239 42.926,9.144 ; 39.751,7.874 40.386,8.509 41.021,7.874 39.751,7.874 ; 42.291,8.509 43.561,8.509 42.926,7.874 42.291,8.509
  text ".Layer_Name" at 88.265,15.875 h1.52
  text "1" at 39.37,7.747 h1.02
  text "2" at 44.577,7.747 h1.02
  text "©" at 34.798,4.953 h2.67
Top Paste:
  text ".Layer_Name" at 66.04,19.685 h1.52
Bottom Paste:
  text ".Layer_Name" at 66.675,13.335 h1.52
Top Solder:
  text ".Layer_Name" at 66.04,17.78 h1.52
Bottom Solder:
  text ".Layer_Name" at 88.265,19.05 h1.52
Drill Guide:
  text ".Layer_Name" at 67.31,4.445 h1.52
M1 Board Outline:
  the board outline again, w0.254
  text ".Layer_Name" at 66.675,10.16 h1.52
M2 Board Dimensions:
  rectangle: 3.175,-10.16 12.7,-6.985
  rectangle: 0,-6.985 3.175,-3.81
  lines w0.178: 0,-6.985 25.4,-6.985 ; 3.175,-10.16 3.175,-3.81 ; 6.35,-10.16 6.35,-3.81 ; 12.7,-10.16 12.7,-3.81 ; 19.05,-10.16 19.05,-3.81 ; 0,-10.16 25.4,-10.16 25.4,-3.81 0,-3.81 0,-10.16
  text ".Layer_Name" at 121.285,15.24 h1.52
M3 3D STEP Top:
  text ".Layer_Name" at 121.285,7.62 h1.52
M4 3D STEP Bottom:
  text ".Layer_Name" at 67.945,0.635 h1.52
M5 Assembly Top:
  text ".VariantName" at 68.58,-5.08 h1.52
M9 Title Sheet:
  lines w0.254: 83.185,207.645 82.766,207.429 -12.484,207.429 -12.484,-33.871 368.516,-33.871 ; 272.847,207.645 273.266,207.429 368.516,207.429 ; 287.109,22.123 287.134,22.123
M10 Fab Notes:
  text ".Layer_Name" at 121.285,19.05 h1.52
M12 Stackup:
  drawing of 305 lines, arcs and shapes, not listed
  text "Layer" at 161.461,51.146 h1.52
  text "Name" at 171.873,51.146 h1.52
  text "Material" at 195.488,51.146 h1.52
  text "Thickness" at 217.326,51.146 h1.52
  text "Constant" at 233.832,51.146 h1.52
  text "Board Layer Stack" at 248.307,51.146 h1.52
  text "Top Overlay" at 171.873,48.098 h1.52
  text "Top Solder" at 171.873,45.05 h1.52
  text "Solder Resist" at 195.488,45.05 h1.52
  text "0,40mil" at 217.326,45.05 h1.52
  text "3.5" at 233.832,45.05 h1.52
  text "1" at 161.461,42.002 h1.52
  text "Top Layer" at 171.873,42.002 h1.52
  text "1,40mil" at 217.326,42.002 h1.52
  text "Dielectric1" at 171.873,38.954 h1.52
  text "FR-4" at 195.488,38.954 h1.52
  text "59,20mil" at 217.326,38.954 h1.52
  text "4.8" at 233.832,38.954 h1.52
  text "2" at 161.461,35.906 h1.52
  text "Bottom Layer" at 171.873,35.906 h1.52
  text "1,40mil" at 217.326,35.906 h1.52
  text "Bottom Solder" at 171.873,32.858 h1.52
  text "Solder Resist" at 195.488,32.858 h1.52
  text "0,40mil" at 217.326,32.858 h1.52
  text "3.5" at 233.832,32.858 h1.52
  text "Bottom Overlay" at 171.873,29.81 h1.52
  text ".Layer_Name" at 121.285,22.225 h1.52
M13 Component Bodies Top:
  text ".Layer_Name" at 121.285,11.43 h1.52
M14 Component Bodies Bottom:
  text ".Layer_Name" at 67.945,-2.54 h1.52
M15 Courtyards Top:
  text ".Layer_Name" at 121.285,1.27 h1.52
M16 Courtyards Bottom:
  text ".Layer_Name" at 121.285,5.08 h1.52
Drill Drawing:
  circle w0.254: c106.08,-14.273 r0.421
  circle w0.254: c106.08,-14.273 r0.702
  lines w0.254: 105.378,-20.588 106.08,-21.29 106.782,-20.588 106.08,-19.887 105.378,-20.588 ; 105.378,-16.729 106.782,-16.729 106.08,-18.132 105.378,-16.729 ; 105.378,-11.817 106.782,-11.817 106.782,-10.414 105.378,-10.414 105.378,-11.817 ; 105.378,-8.659 106.782,-8.659 106.782,-7.256 105.378,-7.256 105.378,-8.659 ; 105.659,-17.01 106.501,-17.01 106.08,-17.852 105.659,-17.01 ; 105.659,-11.536 106.501,-11.536 106.501,-10.694 105.659,-10.694 105.659,-11.536
  lines w0.305: 104.106,-22.237 154.348,-22.237 ; 104.106,-6.449 154.348,-6.449 ; 112.688,-25.395 112.688,-3.291 ; 121.121,-25.395 121.121,-3.291 ; 137.289,-25.395 137.289,-3.291 ; 143.872,-25.395 143.872,-3.291 ; 104.106,-25.395 154.348,-25.395 154.348,-3.291 104.106,-3.291 104.106,-25.395
  text ".Layer_Name" at 67.31,6.985 h1.52
  text "Symbol" at 106.001,-5.502 h1.83
  text "Quantity" at 113.635,-5.502 h1.83
  text "Finished Hole Size" at 122.068,-5.502 h1.83
  text "Plated" at 138.237,-5.502 h1.83
  text "Hole Type" at 144.819,-5.502 h1.83
  text "2" at 113.635,-8.659 h1.52
  text "9.84mil (0.250mm)" at 122.068,-8.659 h1.52
  text "PTH" at 138.237,-8.659 h1.52
  text "Round" at 144.819,-8.659 h1.52
  text "4" at 113.635,-11.817 h1.52
  text "10.00mil (0.254mm)" at 122.068,-11.817 h1.52
  text "PTH" at 138.237,-11.817 h1.52
  text "Round" at 144.819,-11.817 h1.52
  text "11" at 113.635,-14.975 h1.52
  text "12.00mil (0.305mm)" at 122.068,-14.975 h1.52
  text "PTH" at 138.237,-14.975 h1.52
  text "Round" at 144.819,-14.975 h1.52
  text "2" at 113.635,-18.132 h1.52
  text "28.00mil (0.711mm)" at 122.068,-18.132 h1.52
  text "PTH" at 138.237,-18.132 h1.52
  text "Round" at 144.819,-18.132 h1.52
  text "20" at 113.635,-21.29 h1.52
  text "45.28mil (1.150mm)" at 122.068,-21.29 h1.52
  text "PTH" at 138.237,-21.29 h1.52
  text "Round" at 144.819,-21.29 h1.52
  text "39 Total" at 113.635,-24.448 h1.52

## Dimensions
0,0 to 55.88,0 on M2 Board Dimensions
0,0 to 0,25.4 on M2 Board Dimensions
0,-10.16 to 25.4,-10.16 on M2 Board Dimensions